# Altium PCB CT9042 Front Board.PcbDoc
Units mm, origin at the board's own origin, x right, y up, seen from the top; angles counter-clockwise.
Board outline 242.25 x 69.25 mm, 4 copper layers (Top Layer, Layer 1, Layer 2, Bottom Layer), stack 1.794 mm thick; 46 components, 0 nets, 137 pads, 0 vias.
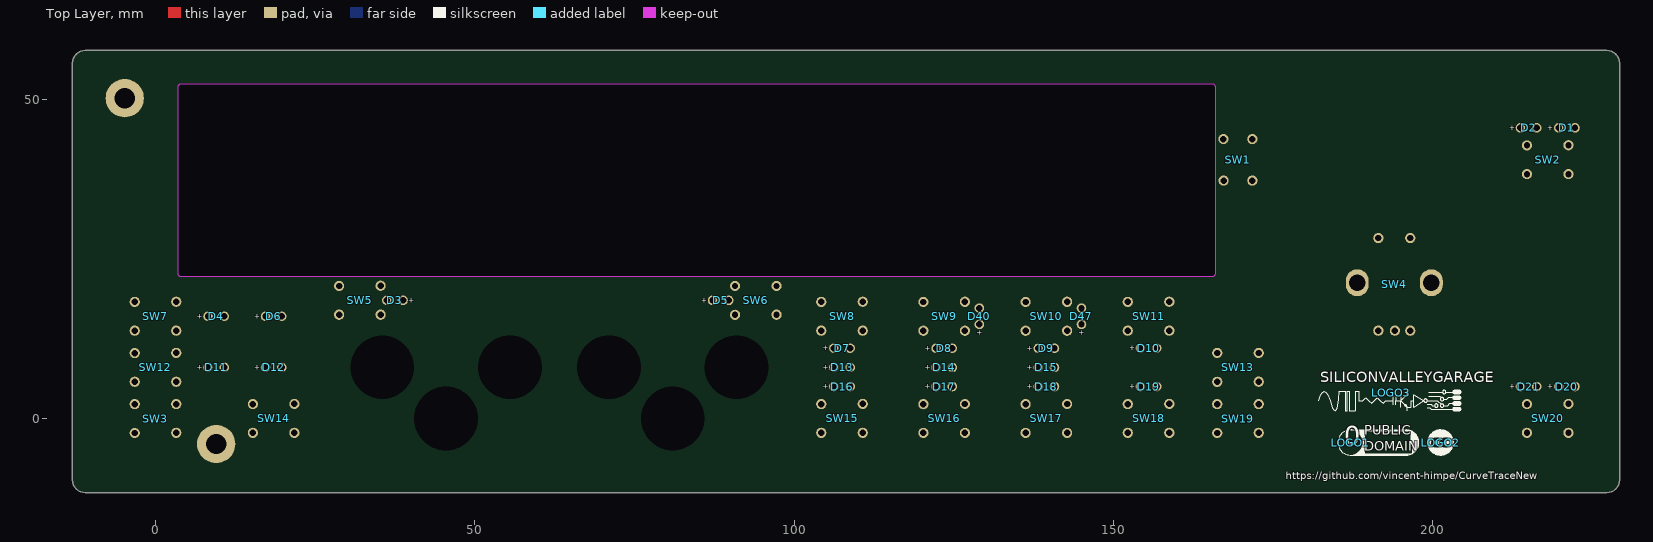
[diagram p0: Top Layer view]
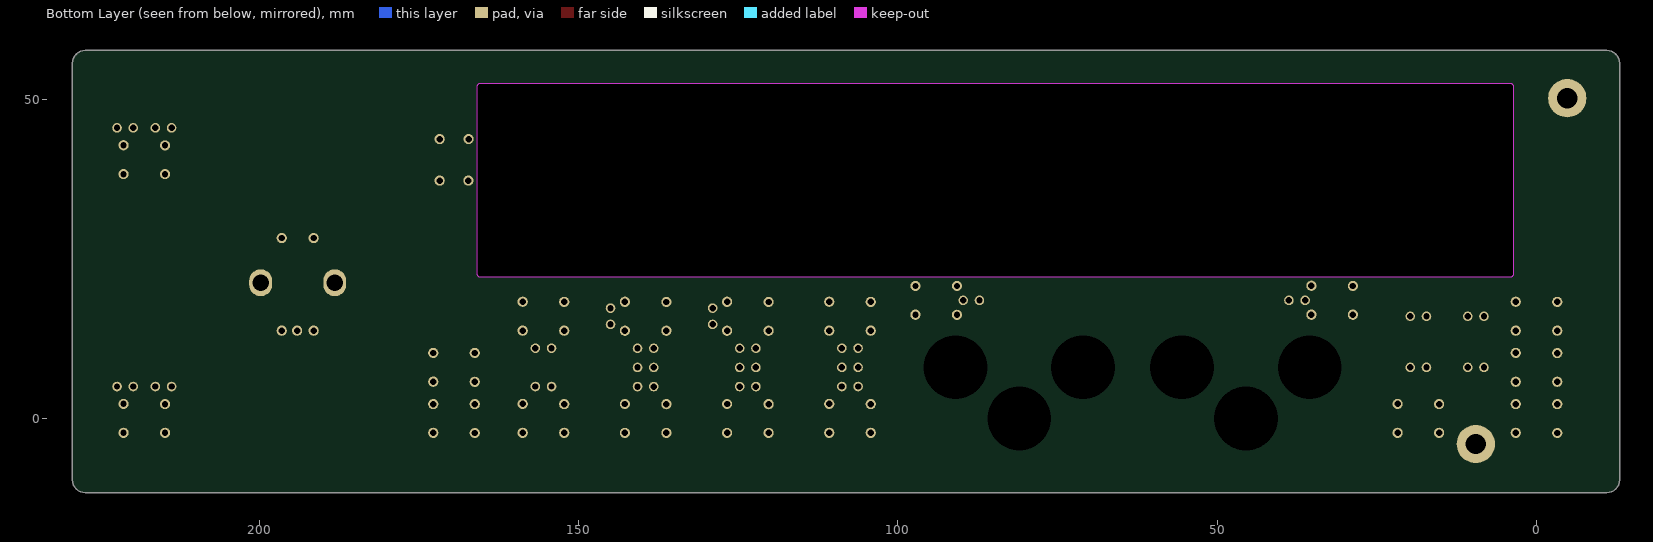
[diagram p1: Bottom Layer view, seen from below]

## Layer stack, top to bottom
Top Solder: solder mask 0.0102, Solder Resist, Dk 3.5
Top Layer: signal copper 0.0356
Dielectric 2: prepreg 0.1016, Core-009, Dk 4.5
Layer 1: signal copper 0.035
Dielectric 1: dielectric 1.45, FR-4, Dk 4.8
Layer 2: signal copper 0.035
Dielectric 3: prepreg 0.1016, Core-009, Dk 4.5
Bottom Layer: signal copper 0.0356
Bottom Solder: solder mask 0.0102, Solder Resist, Dk 3.5

## Board outline
-12.662,-10.727 -12.847,-10.381 -12.96,-10.006 -12.999,-9.616 -12.999,55.634 -12.96,56.024 -12.847,56.399 -12.662,56.745 -12.413,57.048 -12.11,57.297 -11.764,57.482 -11.389,57.596 -10.999,57.634 227.251,57.634 227.641,57.596 228.016,57.482 228.362,57.297 228.665,57.048 228.914,56.745 229.099,56.399 229.213,56.024 229.251,55.634 229.251,-9.616 229.213,-10.006 229.099,-10.381 228.914,-10.727 228.665,-11.03 228.362,-11.279 228.016,-11.464 227.641,-11.578 227.251,-11.616 -10.999,-11.616 -11.389,-11.578 -11.764,-11.464 -12.11,-11.279 -12.413,-11.03
cut-out: 3.551,22.709 3.551,51.909 cw(c4.051,51.909) 4.051,52.409 165.451,52.409 cw(c165.451,51.909) 165.951,51.909 165.951,22.709 cw(c165.451,22.709) 165.451,22.209 4.051,22.209 cw(c4.051,22.709)

## Design rules (kind name [scope] priority, off if disabled: settings)
Clearance [All] p1 off: gap=0.254 ignorepadtopadclearanceinfootprint=FALSE
ComponentClearance [All] p1 off: gap=0.254 collisioncheckmode=3 verticalgap=0.254 showdistances=FALSE
Height [All] p1 off: minheight=0 maxheight=25.4 prefheight=12.7
PolygonConnect [All] p1: connectstyle=Relief reliefconductorwidth=0.254 reliefentries=4 polygonreliefangle="90 Angle" airgapwidth=0.254
RoutingVias [All] p1: holewidth=0.711 width=1.27 viastyle="Through Hole" minholewidth=0.711 minwidth=1.27 maxholewidth=0.711 maxwidth=1.27
SolderMaskExpansion [All] p1: expansion=0.102 istentingtop=FALSE
Width [All] p1: maxlimit=0.254 minlimit=0.254 preferedwidth=0.254
28 further rules are at their usual default settings.

## Components (designator, comment, footprint, x,y, rotation, side; value= is the part's Value field where it differs from the comment)
D1 "Comment" LED-SUNLED-XLUY13D 221.002,45.518 r0 top
D2 "Comment" LED-SUNLED-XLUY13D 215.002,45.518 r0 top
D3 "Comment" LED-SUNLED-XLUY13D 37.501,18.509 r180 top
D4 "Comment" LED-SUNLED-XLUY13D 9.501,16.009 r0 top
D5 "Comment" LED-SUNLED-XLUY13D 88.501,18.509 r0 top
D6 "Comment" LED-SUNLED-XLUY13D 18.501,16.009 r0 top
D7 "D7" LED-SUNLED-XLUY13D 107.501,11.009 r0 top
D8 "Comment" LED-SUNLED-XLUY13D 123.5,11 r0 top
D9 "Comment" LED-SUNLED-XLUY13D 139.5,11 r0 top
D10 "Comment" LED-SUNLED-XLUY13D 155.501,11.009 r0 top
D11 "Comment" LED-SUNLED-XLUY13D 9.501,8.009 r0 top
D12 "Comment" LED-SUNLED-XLUY13D 18.501,8.009 r0 top
D13 "Comment" LED-SUNLED-XLUY13D 107.501,8.009 r0 top
D14 "Comment" LED-SUNLED-XLUY13D 123.5,8 r0 top
D15 "Comment" LED-SUNLED-XLUY13D 139.5,8 r0 top
D16 "Comment" LED-SUNLED-XLUY13D 107.501,5.009 r0 top
D17 "Comment" LED-SUNLED-XLUY13D 123.5,5 r0 top
D18 "Comment" LED-SUNLED-XLUY13D 139.5,5 r0 top
D19 "Comment" LED-SUNLED-XLUY13D 155.501,5.009 r0 top
D20 "Comment" LED-SUNLED-XLUY13D 221.001,5.009 r0 top
D21 "Comment" LED-SUNLED-XLUY13D 215.001,5.009 r0 top
D40 "Comment" LED-SUNLED-XLUY13D 129.001,16.009 r90 top
D47 "Comment" LED-SUNLED-XLUY13D 145.001,16.009 r90 top
LOGO1 "LOGO-LICENSE-CC0-PUBLIC" LOGO-LICENSE-CC0-PUBLIC 187.136,-3.758 r0 top
LOGO2 "LOGO-LICENSE-CC" LOGO-LICENSE-CC 201.236,-3.758 r0 top
LOGO3 "SILICONVALLEYGARAGE" SILICONVALLEYGARAGE 193.501,4.009 r0 top
SW1 "Comment" SWITCH-ESWITCH-TL1105SPF-1RCAP 169.501,40.509 r90 top
SW2 "Comment" SWITCH-ESWITCH-TL1105SPF-1RCAP 218.002,40.518 r0 top
SW3 "Comment" SWITCH-ESWITCH-TL1105SPF-1RCAP 0.001,0.009 r180 top
SW4 "Comment" SWITCH-BOURNS-PEC12R-4120F-S0012 193.979,21.259 r0 top
SW5 "Comment" SWITCH-ESWITCH-TL1105SPF-1RCAP 32.001,18.509 r0 top
SW6 "Comment" SWITCH-ESWITCH-TL1105SPF-1RCAP 94.001,18.509 r180 top
SW7 "Comment" SWITCH-ESWITCH-TL1105SPF-1RCAP 0.001,16.009 r0 top
SW8 "Comment" SWITCH-ESWITCH-TL1105SPF-1RCAP 107.501,16.009 r0 top
SW9 "Comment" SWITCH-ESWITCH-TL1105SPF-1RCAP 123.5,16 r0 top
SW10 "Comment" SWITCH-ESWITCH-TL1105SPF-1RCAP 139.5,16 r0 top
SW11 "Comment" SWITCH-ESWITCH-TL1105SPF-1RCAP 155.501,16.009 r0 top
SW12 "Comment" SWITCH-ESWITCH-TL1105SPF-1RCAP 0,8 r0 top
SW13 "Comment" SWITCH-ESWITCH-TL1105SPF-1RCAP 169.502,8.018 r180 top
SW14 "Comment" SWITCH-ESWITCH-TL1105SPF-1RCAP 18.501,0.009 r0 top
SW15 "Comment" SWITCH-ESWITCH-TL1105SPF-1RCAP 107.501,0.009 r0 top
SW16 "Comment" SWITCH-ESWITCH-TL1105SPF-1RCAP 123.5,0 r0 top
SW17 "Comment" SWITCH-ESWITCH-TL1105SPF-1RCAP 139.5,0 r0 top
SW18 "Comment" SWITCH-ESWITCH-TL1105SPF-1RCAP 155.501,0.009 r0 top
SW19 "Comment" SWITCH-ESWITCH-TL1105SPF-1RCAP 169.501,0.009 r180 top
SW20 "Comment" SWITCH-ESWITCH-TL1105SPF-1RCAP 218.001,0.009 r0 top

## Footprints (in the part's own frame and the unit in brackets; to place one, negate y for a bottom-side part, rotate by r counter-clockwise, add the part's x,y. Pads: shape width x height; smd on the part's side, far side on the other; paste and mask are expansions set on the pad)
LED-SUNLED-XLUY13D [mm] "LED.YELLOW,DIFFUSED,FLAT TOP,2MM LENS,RECTANGLE BODY"
  round 1.5 hole 1: 1(1.27,0) 2(-1.27,0)
  body extent -2.4,-1.26 2.4,1.25, height 10.05
LOGO-LICENSE-CC [mm]
  silkscreen extent -2.08,-2.05 2.03,2.05
LOGO-LICENSE-CC0-PUBLIC [mm]
  silkscreen extent -1.97,-1.98 10.7,1.97
SILICONVALLEYGARAGE [mm]
  silkscreen extent -11.38,-2.89 10.94,0.48
SWITCH-BOURNS-PEC12R-4120F-S0012 [mm] "SWITCH,ROTATRY+CLICK,20MM AXLE"
  round 1.6 hole 1: 1(-2.5,7) 2(2.5,7) A(-2.5,-7.5) B(2.5,-7.5) C(0.1,-7.5)
  oval 3.6x4.2 hole 2.6: M1(5.8,0) M2(-5.8,0)
  body extent -7,-7.6 7,7.15, height 20.01
SWITCH-ESWITCH-TL1105SPF-1RCAP [mm] "SWTICH,TACT,MOM,WITH 1R CAP,E-SWITCH TL1105SP"
  round 1.6 hole 1: 1(-3.25,-2.25) 2(3.25,-2.25) 3(-3.25,2.25) 4(3.25,2.275)
  body extent -3.94,-3 3.94,3, height 13.5

## Free pads (board coordinates)
  round 6 hole 3.2 paste-2539.97 mask-1: 11(-4.81,50.164) 12(9.501,-3.991)
  round 0 hole 10 unplated: M3(35.502,8.018) M3(45.502,0.018) M3(55.502,8.018) M3(71.002,8.018) M3(81.002,0.018) M3(91.002,8.018)

## Nets (pads, with @x,y where several pads share a name; then routed paths per layer and width w, separated by ;. In a path a pad name is that pad's centre, name@x,y a point inside that pad or via, vN(x,y) a via of type N, cw(c..) or ccw(c..) an arc to the next point about the centre after c; other vN are vias at no path point)
pads on no net: D1.1 D1.2 D2.1 D2.2 D3.1 D3.2 D4.1 D4.2 D5.1 D5.2 D6.1 D6.2 D7.1 D7.2 D8.1 D8.2 D9.1 D9.2 D10.1 D10.2 D11.1 D11.2 D12.1 D12.2 D13.1 D13.2 D14.1 D14.2 D15.1 D15.2 D16.1 D16.2 D17.1 D17.2 D18.1 D18.2 D19.1 D19.2 D20.1 D20.2 D21.1 D21.2 D40.1 D40.2 D47.1 D47.2 SW1.1 SW1.2 SW1.3 SW1.4 SW2.1 SW2.2 SW2.3 SW2.4 SW3.1 SW3.2 SW3.3 SW3.4 SW4.1 SW4.2 SW4.A SW4.B SW4.C SW4.M1 SW4.M2 SW5.1 SW5.2 SW5.3 SW5.4 SW6.1 SW6.2 SW6.3 SW6.4 SW7.1 SW7.2 SW7.3 SW7.4 SW8.1 SW8.2 SW8.3 SW8.4 SW9.1 SW9.2 SW9.3 SW9.4 SW10.1 SW10.2 SW10.3 SW10.4 SW11.1 SW11.2 SW11.3 SW11.4 SW12.1 SW12.2 SW12.3 SW12.4 SW13.1 SW13.2 SW13.3 SW13.4 SW14.1 SW14.2 SW14.3 SW14.4 SW15.1 SW15.2 SW15.3 SW15.4 SW16.1 SW16.2 SW16.3 SW16.4 SW17.1 SW17.2 SW17.3 SW17.4 SW18.1 SW18.2 SW18.3 SW18.4 SW19.1 SW19.2 SW19.3 SW19.4 SW20.1 SW20.2 SW20.3 SW20.4

## Silkscreen, mask and mechanical layers (free items; w line width, h text height)
Top Overlay:
  text "https://github.com/vincent-himpe/CurveTraceNew" at 177.017,-9.933 h2
FACEPLATE:
  lines w0.05: 3.551,22.709 ccw(c4.051,22.709) 4.051,22.209 165.451,22.209 ccw(c165.451,22.709) 165.951,22.709 165.951,51.909 ccw(c165.451,51.909) 165.451,52.409 4.051,52.409 ccw(c4.051,51.909) 3.551,51.909 3.551,22.709
FRONT GRAPHICS:
  drawing of 249 lines, arcs and shapes, not listed
  text "SILICONVALLEYGARAGE" at -6.294,52.256 h2.3
  text "Marker / Trace" at 166.001,50.009 h4
  text "CT9084 Curve Tracer" at 14.992,48.688 h7
  text "INSTRUMENTS" at -2.585,47.414 h2.3
  text "1" at 214.752,47.123 h3
  text "2" at 220.49,47.113 h3
  text "Marker" at 188.776,45.839 h4
  text "Page" at 166.895,44.871 h3
  text "DUT" at 30.501,23.509 h4
  text "Vmax" at 103.001,23.509 h4
  text "Imax" at 119.001,23.504 h4
  text "Pmax" at 135.001,23.509 h4
  text "Config" at 4.501,23.472 h4
  text "Run" at 151.001,23.472 h4
  text "Limit" at 104.862,20.125 h3
  text "Limit" at 120.862,20.125 h3
  text "Limit" at 136.862,20.125 h3
  text "ALT" at 152.886,20.123 h3
  text "A" at 35.001,19.759 h4
  text "B" at 86.001,19.759 h4
  text "BIPOLAR" at 4.594,18.113 h3
  text "FET" at 16.552,18.123 h3
  text "Count" at 165.913,12.122 h3
  text "200mA" at 124.771,10.386 h2.1
  text "40V" at 110.27,10.377 h2.1
  text "4W" at 140.77,10.38 h2.1
  text "P" at 8.891,10.123 h3
  text "N" at 17.846,10.123 h3
  text "20mA" at 124.771,7.386 h2.1
  text "10V" at 110.271,7.377 h2.1
  text "0.4W" at 140.771,7.377 h2.1
  text "A" at 214.24,6.614 h3
  text "B" at 220.379,6.614 h3
  text "2V" at 110.27,4.373 h2.1
  text "2mA" at 124.771,4.382 h2.1
  text "40mW" at 140.77,4.377 h2.1
  text "Setup" at 15.416,-5.629 h3
  text "Range" at 104.162,-5.621 h3
  text "Range" at 120.162,-5.621 h3
  text "Range" at 136.162,-5.621 h3
  text "Trace" at 183.457,-5.661 h4
  text "Run/Stop" at 149.974,-5.716 h3
  text "DUT" at 215.859,-5.869 h3
  text "Select" at 166.13,-5.878 h3
  text "Power" at -4.999,-7.528 h4
Board:
  lines w0.05: 8.551,29.059 9.551,29.059 161.051,29.059 161.051,45.559 8.551,45.559 8.551,37.309 8.551,29.059
  lines w0.1: -12.999,-9.616 -12.96,-10.006 -12.847,-10.381 -12.662,-10.727 -12.413,-11.03 -12.11,-11.279 -11.764,-11.464 -11.389,-11.578 -10.999,-11.616 227.251,-11.616 227.641,-11.578 228.016,-11.464 228.362,-11.279 228.665,-11.03 228.914,-10.727 229.099,-10.381 229.213,-10.006 229.251,-9.616 229.251,55.634 229.213,56.024 229.099,56.399 228.914,56.745 228.665,57.048 228.362,57.297 228.016,57.482 227.641,57.596 227.251,57.634 -10.999,57.634 -11.389,57.596 -11.764,57.482 -12.11,57.297 -12.413,57.048 -12.662,56.745 -12.847,56.399 -12.96,56.024 -12.999,55.634 -12.999,-9.616 ; -8.749,-8.316 224.751,-8.316 224.751,54.334 -8.749,54.334 -8.749,-8.316
  text "BORDER" at 98.829,-10.435 h3

## Text inside footprints (layer, text, board x,y; h text height)
D1: Top Overlay "+" at 217.952,45.168 h0.8
D2: Top Overlay "+" at 211.952,45.168 h0.8
D3: Top Overlay "+" at 40.551,18.859 h0.8 r180
D4: Top Overlay "+" at 6.451,15.659 h0.8
D5: Top Overlay "+" at 85.451,18.159 h0.8
D6: Top Overlay "+" at 15.451,15.659 h0.8
D7: Top Overlay "+" at 104.451,10.659 h0.8
D8: Top Overlay "+" at 120.45,10.65 h0.8
D9: Top Overlay "+" at 136.45,10.65 h0.8
D10: Top Overlay "+" at 152.451,10.659 h0.8
D11: Top Overlay "+" at 6.451,7.659 h0.8
D12: Top Overlay "+" at 15.451,7.659 h0.8
D13: Top Overlay "+" at 104.451,7.659 h0.8
D14: Top Overlay "+" at 120.45,7.65 h0.8
D15: Top Overlay "+" at 136.45,7.65 h0.8
D16: Top Overlay "+" at 104.451,4.659 h0.8
D17: Top Overlay "+" at 120.45,4.65 h0.8
D18: Top Overlay "+" at 136.45,4.65 h0.8
D19: Top Overlay "+" at 152.451,4.659 h0.8
D20: Top Overlay "+" at 217.951,4.659 h0.8
D21: Top Overlay "+" at 211.951,4.659 h0.8
D40: Top Overlay "+" at 129.351,12.959 h0.8 r90
D47: Top Overlay "+" at 145.351,12.959 h0.8 r90
LOGO1: Top Overlay "0" at 186.145,-5.12 h5; Top Overlay "PUBLIC / DOMAIN" at 189.286,-5.57 h2.5